# Altium PCB BRD131005.pcbdoc
Units mm, origin at the board's own origin, x right, y up, seen from the top; angles counter-clockwise.
Board outline 33 x 60 mm, 2 copper layers (Top Layer, Bottom Layer), stack 1.621 mm thick; 26 components, 15 nets, 63 pads, 0 vias.
Unrouted connection lines stored in the file: 2.
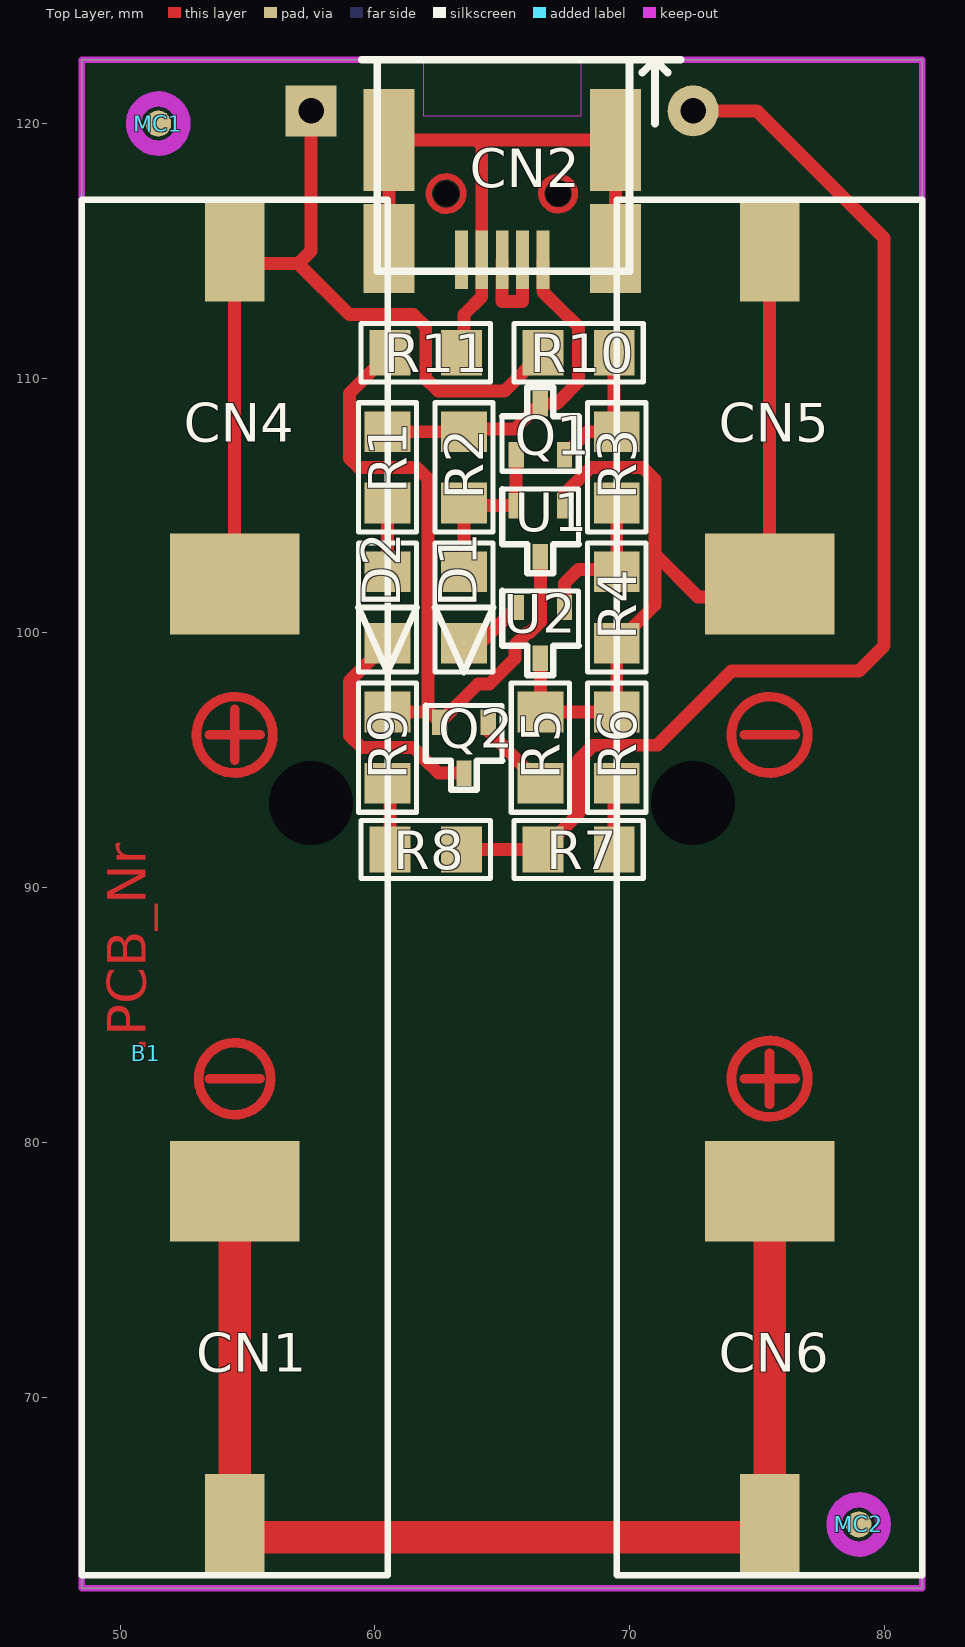
[diagram p0: Top Layer view]
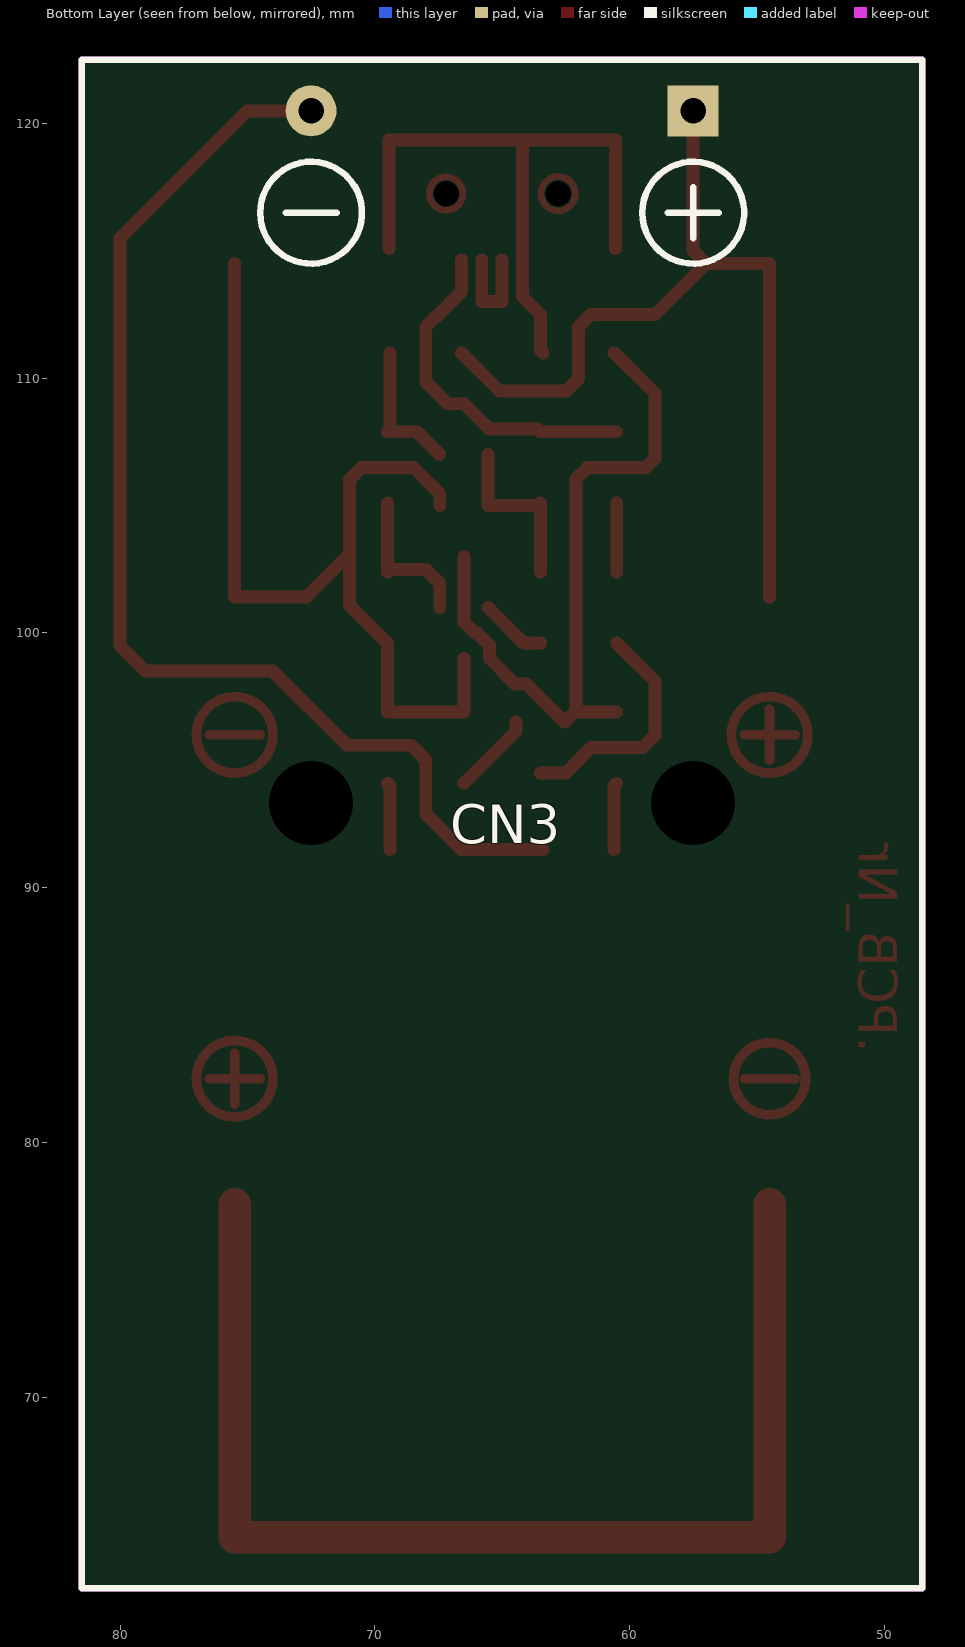
[diagram p1: Bottom Layer view, seen from below]
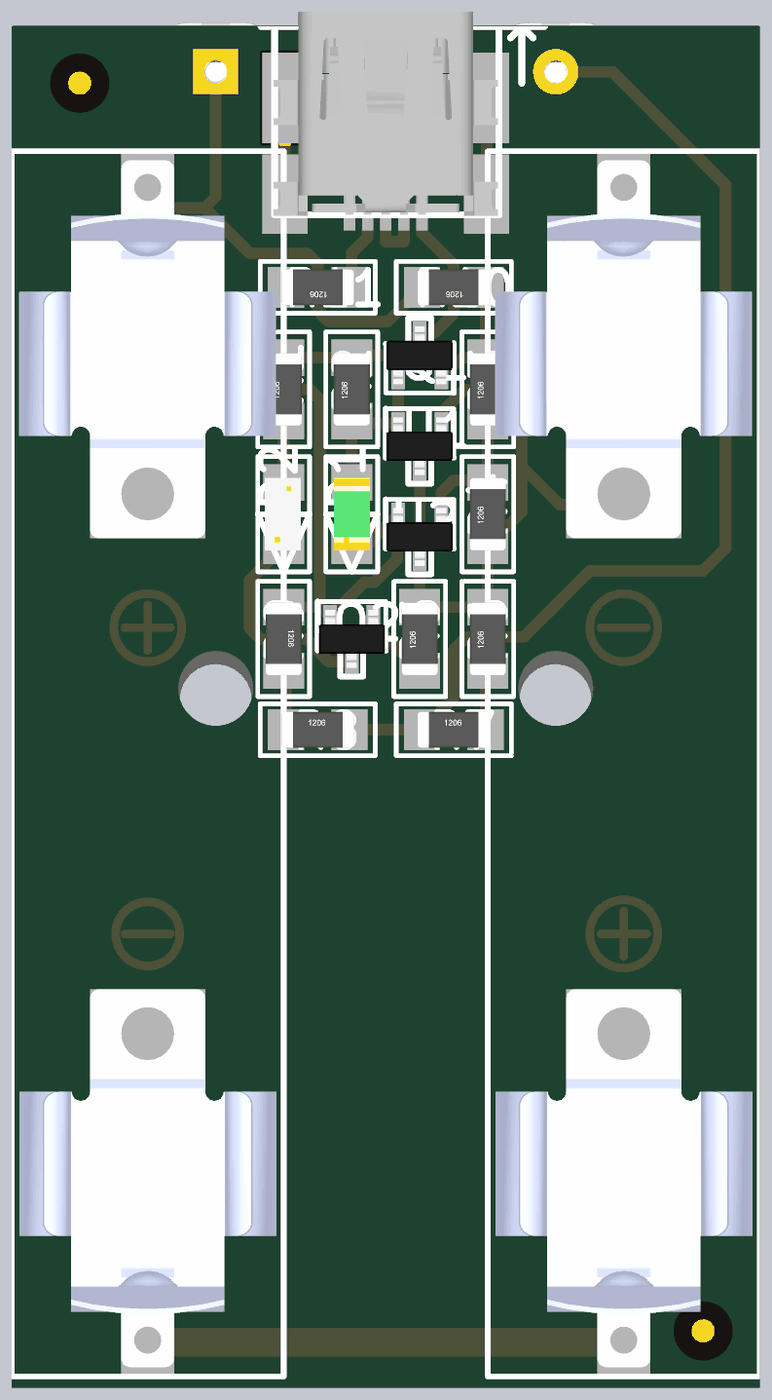
[diagram p2: 3D render of the assembled board from above, using the file's embedded part models]

## Layer stack, top to bottom
Top Layer: signal copper 0.0356
Dielectric: core 1.55, FR-4, Dk 4.8
Bottom Layer: signal copper 0.0356

## Board outline
48.5,62.5 48.5,122.5 81.5,122.5 81.5,62.5

## Design rules (kind name [scope] priority, off if disabled: settings)
Clearance [All] p1: gap=0.254
HoleSize [All] p1: absolutevalues=TRUE maxlimit=3.5 minlimit=0.6 maxpercent=80.000 minpercent=20.000
MinimumAnnularRing [All] p1: minimumring=0.254
MinimumSolderMaskSliver SilkscreenOverComponentPads [All] p2: minsoldermaskwidth=0.254
PolygonConnect [All] p1: connectstyle=Relief reliefconductorwidth=0.254 reliefentries=4 polygonreliefangle="90 Angle" airgapwidth=0.254
RoutingVias [All] p1: holewidth=0.6 width=1.2 viastyle="Through Hole" minholewidth=0.6 minwidth=1.2 maxholewidth=0.6 maxwidth=1.2
SolderMaskExpansion [All] p1: expansion=0
Width [All] p1: maxlimit=1.27 minlimit=0.381 preferedwidth=0.508
27 further rules are at their usual default settings.

## Components (designator, comment, footprint, x,y, rotation, side; value= is the part's Value field where it differs from the comment)
B1 "BRD131005/1" MC_BoardNr 51,83.5 r90 top
CN1 "BAT_CLIP_AAA" CN_BAT_CLIP_AAA_Keystone_55 54.5,65 r90 top
CN2 "CNUSB04F4" CN_USB_AB_mini 65,122.5 r270 top
CN3 "BAT_CLIP_AA" CN_BAT_CLIP_AA_KEYSTONE_2462 57.5,120.5 r90 bottom
CN4 "BAT_CLIP_AAA" CN_BAT_CLIP_AAA_Keystone_55 54.5,115 r270 top
CN5 "BAT_CLIP_AAA" CN_BAT_CLIP_AAA_Keystone_55 75.5,115 r270 top
CN6 "BAT_CLIP_AAA" CN_BAT_CLIP_AAA_Keystone_55 75.5,65 r90 top
D1 "KPT-3216SGC" DI_LED_1206_G 63.5,101 r270 top
D2 "SML-LX1206IW-TR" DI_LED_1206_R 60.5,101 r270 top
MC1 "Fiducial" MC_FIDUCIAL 51.5,120 r0 top
MC2 "Fiducial" MC_FIDUCIAL 79,65 r0 top
Q1 "MMBT2222A" SC_SOT23 66.5,108 r90 top
Q2 "MMBT2222A" SC_SOT23 63.5,95.5 r270 top
R1 "YRES470E" RE_1206 60.5,106.5 r90 top
R2 "YRES470E" RE_1206 63.5,106.5 r90 top
R3 "YRES15K" RE_1206 69.5,106.5 r90 top
R4 "12K / 1%" RE_1206 69.5,101 r90 top
R5 "12K / 1%" RE_1206 66.5,95.5 r90 top
R6 "4E7 / 1%" RE_1206 69.5,95.5 r90 top
R7 "4E7 / 1%" RE_1206 68,91.5 r0 top
R8 "4E7 / 1%" RE_1206 62,91.5 r0 top
R9 "1.5E/1%" RE_1206 60.5,95.5 r270 top
R10 "YRES0E" RE_1206 68,111 r180 top
R11 "YRES0E" RE_1206 62,111 r180 top
U1 "TLV431" SC_SOT23 66.5,104 r270 top
U2 "TLV431" SC_SOT23 66.5,100 r270 top

## Footprints (in the part's own frame and the unit in brackets; to place one, negate y for a bottom-side part, rotate by r counter-clockwise, add the part's x,y. Pads: shape width x height; smd on the part's side, far side on the other; paste and mask are expansions set on the pad)
CN_BAT_CLIP_AA_KEYSTONE_2462 [mm]
  rect 2x2 hole 1: 1(0,0)
  round 2 hole 1: 2(0,15)
  round 0 hole 3.3 unplated: 3(-27.18,0) 4(-27.18,15)
  silkscreen extent -58,-9 2,24, body extent -57.56,-8.97 2.16,23.95, height 16
CN_BAT_CLIP_AAA_Keystone_55 [mm] "Keystone 55: AAA battery clip"
  rect 3.96x2.34 smd: 1(0,0)
  rect 3.96x5.08 smd: 1(13.08,0)
  silkscreen extent -2,-6 52,6, body extent -1.6,-5.67 15.06,5.67, height 13.32
CN_USB_AB_mini [mm] "Mini AB connector"
  rect 2.3x0.5 smd: 1(7.85,1.6) 2(7.85,0.8) 3(7.85,0) 4(7.85,-0.8) 5(7.85,-1.6)
  rect 4x2 smd: 6(3.15,4.45)
  rect 4x2 smd mask+0.102: 6(3.15,-4.45)
  rect 3.5x2 smd: 6(7.4,4.45) 6(7.4,-4.45)
  round 0.9 hole 1: ""(5.25,2.2) ""(5.25,-2.2)
  Top Layer pour cut-out: 0,3.1 2.2,3.1 2.2,-3.1 0,-3.1
  Top Layer keep-out region: 0,-3.1 2.2,-3.1 2.2,3.1 0,3.1
  silkscreen extent 0,-5.5 8.3,7, body extent -0.65,-4.95 8.35,4.95, height 4
DI_LED_1206_G [mm]
  rect 1.6x1.8 smd: 1(-1.4,0) 2(1.4,0)
  silkscreen extent -2.54,-1.14 2.54,1.14, body extent -1.6,-0.79 1.6,0.81, height 1.11
DI_LED_1206_R [mm]
  rect 1.6x1.8 smd: 1(-1.4,0) 2(1.4,0)
  silkscreen extent -2.54,-1.14 2.54,1.14, body extent -1.6,-0.84 1.6,0.76, height 1.11
MC_BoardNr [mm] "Board number"
MC_FIDUCIAL [mil] "Fiducial"
  round 40 smd paste-3937.01 mask+31.5: 0(0,0)
  Top Layer keep-out circle w24: c0,0 r38
RE_1206 [mm] "Chip Resistor; Body 3.2 x 1.6 mm (LxW typ)"
  rect 1.6x1.8 smd: 1(-1.4,0) 2(1.4,0)
  silkscreen extent -2.54,-1.14 2.54,1.14, body extent -1.6,-0.8 1.6,0.8, height 1
SC_SOT23 [mm] "SOT23, 3-Leads, Body 2.9x1.3mm, Pitch 0.95mm, Lead Span 2.3mm, IPC High Density"
  rect 1x0.6 smd: 1(-1,0.95) 2(-1,-0.95) 3(1,0)
  silkscreen extent -1.65,-1.5 1.65,1.5, body extent -1.27,-1.46 1.27,1.46, height 0.99

## Part data
B1: library part BARE_PCB
CN2: "*"
D1: library part DI_LED_GREEN
D2: library part DI_LED_RED
Q1 Q2: "Amplifier Transistor NPN Silicon"
R1 R2 R3 R10 R11: "Resistor"
R4 R5: library part RC1206FR-0712KL, "Resistor"
R6 R7 R8: library part ASC1206-4R7FT5, "Resistor"
R9: library part MCSR12W1R50FTL, "Resistor"

## Nets (pads, with @x,y where several pads share a name; then routed paths per layer and width w, separated by ;. In a path a pad name is that pad's centre, name@x,y a point inside that pad or via, vN(x,y) a via of type N, cw(c..) or ccw(c..) an arc to the next point about the centre after c; other vN are vias at no path point)
GND: CN2.4 CN2.6 Q2.2 R9.1 R11.1 R11.2 U1.3 | length 54.1
  Top Layer w0.508: R9.1 62.15,96.9 ; CN2.6@60.55,115.1 60.55,119.35 64,119.35 ; R11.2 59,109.4 59,106.857 59.357,106.5 61.643,106.5 62.092,106.051 62.092,96.958 62.15,96.9 ; R11.1 63.5,111.1 63.5,112.5 64.2,113.2 CN2.4 64.2,119.15 64,119.35 ; 65.974,99.992 65.5,99.518 65.5,99 64.5,98 64.05,98 Q2.2 62.15,96.9 ; 66.076,100.008 66.5,100.432 66.5,101 U1.3 ; CN2.6@69.45,115.1 69.45,119.35 64,119.35
NetCN1_1: CN1.1 CN6.1 | length 47.2
  Top Layer w1.27: CN1.1@54.5,77.58 54.5,64.5 75.5,64.5 CN6.1@75.5,77.58
NetCN2_1: CN2.1 Q1.3 R1.2 R2.2 | length 13.6
  Top Layer w0.508: R1.2 R2.2@63.4,107.9 ; R2.2 63.608,108.008 65.508,108.008 Q1.3 67.143,109 68,109.857 68,112.018 67.61,112.408 67.592,112.408 66.6,113.4 CN2.1
NetCN2_2: CN2.2 CN2.3 | length 4.1
  Top Layer w0.508: CN2.3 65,113.012 65.8,113.012 CN2.2
NetCN3_2: CN3.2 R7.1 R8.2 | length 46.7
  Top Layer w0.508: R8.2 R7.1 68,92.9 68,95.018 68.574,95.592 71.092,95.592 74,98.5 79,98.5 80,99.5 80,115.5 75,120.5 CN3.2
NetCN5_1: CN5.1 R4.1 R5.2 R6.2 U1.1 U2.3 | length 37.8
  Top Layer w0.508: U2.3 R5.2 R6.2 R4.1 71,101.1 71,106.018 70.518,106.5 68.482,106.5 67.45,105.468 U1.1 ; 71,103.1 72.68,101.42 75.5,101.42 CN5.1@75.5,114.5
NetD1_1: D1.1 Q1.1 R2.1 U1.2 | length 6.8
  Top Layer w0.508: D1.1 R2.1 63.6,105 U1.2 Q1.1
NetD1_2: D1.2 U2.2 | length 2.6
  Top Layer w0.508: D1.2 64.15,99.6 U2.2
NetD2_1: D2.1 R1.1 | length 2.7
  Top Layer w0.508: D2.1 R1.1
NetD2_2: D2.2 Q2.3 | length 9.4
  Top Layer w0.508: D2.2 59,98.1 59,95.982 59.482,95.5 61.519,95.5 61.908,95.11 61.908,95.092 62.5,94.5 Q2.3
NetQ2_1: Q2.1 R5.1 | length 3.2
  Top Layer w0.508: Q2.1 64.45,96.15 R5.1
NetR3_1: R3.1 R4.2 U2.1 | length 6
  Top Layer w0.508: U2.1 67.45,101.95 68,102.5 69.4,102.5 R4.2 R3.1
NetR6_1: R6.1 R7.2 | length 2.6
  Top Layer w0.508: R7.2 69.4,94 R6.1
NetR8_1: R8.1 R9.2 | length 2.6
  Top Layer w0.508: R9.2 60.6,94 R8.1
VA: CN3.1 CN4.1 Q1.2 R3.2 R10.1 R10.2 | length 40.8
  Top Layer w0.508: CN4.1@54.5,101.42 54.5,114.5 57,114.5 ; CN3.1 57.5,115 57,114.5 ; R10.2 65.1,109.5 62.482,109.5 62,109.982 62,112.018 61.518,112.5 59,112.5 57,114.5 ; Q1.2 68.35,107.9 R3.2 69.4,108 R10.1
pads on no net: CN2. CN2.5 CN3.3 CN3.4 MC1.0 MC2.0
copper on no net: | length 57.5
  Top Layer w0.254: 63.475,117.25 ccw(c62.8,117.25) 63.475,117.25 ; 67.859,117.25 ccw(c67.2,117.25) 67.859,117.25
  Top Layer w0.381: 53.5,82.5 55.5,82.5 ; 53.5,96 55.5,96 ; 54.5,95 54.5,97 ; 74.5,82.5 76.5,82.5 ; 74.5,96 76.5,96 ; 75.5,81.5 75.5,83.5 ; 55.914,82.5 ccw(c54.5,82.5) 55.914,82.5 ; 56,96 ccw(c54.5,96) 56,96 ; 77,82.5 ccw(c75.5,82.5) 77,82.5 ; 77,96 ccw(c75.5,96) 77,96

## Keep-outs
Keep-Out Layer:
  lines w0.254: 48.5,62.5 81.5,62.5 81.5,122.5 71,122.5 59,122.5 48.5,122.5 48.5,62.5

## Silkscreen, mask and mechanical layers (free items; w line width, h text height)
Mechanical 4:
  lines w0.127: 5.08,0 0,0 ; 35.56,140.97 5.08,140.97 ; 48.26,0 48.26,5.08 ; 48.26,140.97 48.26,146.05 ; 73.66,12.725 187.96,12.725 ; 73.66,20.345 187.96,20.345 ; 73.66,27.965 111.76,27.965 ; 96.52,0 96.52,5.08 ; 96.52,140.97 96.52,146.05 ; 111.76,5.105 111.76,20.345 111.76,35.585 ; 144.78,0 144.78,5.08 ; 144.78,140.97 144.78,146.05 ; 165.1,5.105 165.1,20.345 ; 187.96,0 193.04,0 ; 0,0 193.04,0 ; 0,0 0,146.05 193.04,146.05 193.04,0 ; 5.08,140.97 187.96,140.97 187.96,5.08 5.08,5.08 5.08,140.97 ; 73.66,5.105 73.66,35.585 ; 73.66,5.105 187.96,5.105 187.96,35.585 111.76,35.585 ; 73.66,5.105 38.1,5.105 38.1,35.585 73.66,35.585 ; 73.66,35.585 111.76,35.585 ; 0,73.025 5.08,73.025 0,73.025 ; 187.96,73.025 193.04,73.025 187.96,73.025
  text "A" at 168.529,143.993 h1.78 r90
  text "D" at 25.019,142.723 h1.78 r270
  text "C" at 72.644,142.723 h1.78 r270
  text "B" at 118.364,142.723 h1.78 r270
  text "2" at 3.429,110.338 h1.78 r90
  text "2" at 191.389,110.338 h1.78 r90
  text "1" at 3.429,37.313 h1.78 r90
  text "1" at 191.389,37.313 h1.78 r90
  text "ENGINEER:" at 74.93,33.045 h1.14
  text "TITLE:" at 113.03,33.045 h1.14
  text ".ProjectName" at 119.38,26.238 h2.5
  text "PCB DESIGNER:" at 74.93,25.552 h1.14
  text ".DrawnByX" at 87.757,22.581 h2.5
  text "DATE:" at 74.93,17.805 h1.14
  text "PART NO.:" at 113.03,17.805 h1.14
  text "REV:" at 166.37,17.805 h1.14
  text ".PRINT_DATE" at 76.2,14.757 h1.78
  text ".RevisionNR" at 166.421,14.427 h2.5
  text "FILE NAME:" at 74.93,10.185 h1.14
  text "DWG NO:" at 113.03,10.185 h1.14
  text "SCALE:" at 166.37,10.185 h1.14
  text ".PCB_Nr" at 121.996,7.747 h2.5
  text ".PCB_FILE_NAME_NO_PATH" at 76.2,7.137 h1.78
  text "D" at 22.022,1.905 h1.78 r270
  text "C" at 70.028,1.905 h1.78 r270
  text "B" at 118.542,1.905 h1.78 r270
  text "A" at 166.599,1.905 h1.78 r270
Mechanical 5:
  lines w0.127: 5.08,0 0,0 ; 5.08,12.725 119.38,12.725 ; 5.08,20.345 119.38,20.345 ; 27.94,5.105 27.94,20.345 ; 48.26,0 48.26,5.08 ; 48.26,140.97 48.26,146.05 ; 81.28,5.105 81.28,20.345 81.28,35.585 ; 81.28,27.965 119.38,27.965 ; 96.52,0 96.52,5.08 ; 96.52,140.97 96.52,146.05 ; 144.78,0 144.78,5.08 ; 144.78,140.97 144.78,146.05 ; 157.48,140.97 187.96,140.97 ; 187.96,0 193.04,0 ; 0,0 193.04,0 ; 0,0 0,146.05 193.04,146.05 193.04,0 ; 81.28,35.585 5.08,35.585 5.08,5.105 119.38,5.105 ; 81.28,35.585 119.38,35.585 ; 119.38,5.105 119.38,35.585 ; 119.38,5.105 154.94,5.105 154.94,35.585 119.38,35.585 ; 187.96,140.97 5.08,140.97 5.08,5.08 187.96,5.08 187.96,140.97 ; 0,73.025 5.08,73.025 0,73.025 ; 187.96,73.025 193.04,73.025 187.96,73.025
  text "A" at 25.019,143.993 h1.78 r270
  text "B" at 72.644,143.993 h1.78 r270
  text "C" at 118.364,143.993 h1.78 r270
  text "D" at 166.624,143.993 h1.78 r270
  text "2" at 1.524,110.338 h1.78 r270
  text "2" at 189.484,110.338 h1.78 r270
  text "1" at 1.524,37.313 h1.78 r270
  text "1" at 189.484,37.313 h1.78 r270
  text "TITLE:" at 80.01,33.045 h1.14
  text "ENGINEER:" at 118.11,33.045 h1.14
  text ".ProjectName" at 74.549,26.441 h2.5
  text "PCB DESIGNER:" at 118.11,25.552 h1.14
  text ".DrawnByX" at 105.664,22.504 h2.5
  text "REV:" at 26.67,17.805 h1.14
  text "PART NO.:" at 80.01,17.805 h1.14
  text "DATE:" at 118.11,17.805 h1.14
  text ".PRINT_DATE" at 116.84,14.757 h1.78
  text ".RevisionNR" at 27.483,13.36 h2.5
  text "SCALE:" at 26.67,10.185 h1.14
  text "DWG NO:" at 80.01,10.185 h1.14
  text "FILE NAME:" at 118.11,10.185 h1.14
  text ".PCB_FILE_NAME_NO_PATH" at 116.84,7.137 h1.78
  text ".PCB_Nr" at 72.263,6.883 h2.5
  text "B" at 70.104,3.023 h1.78 r270
  text "C" at 118.364,3.023 h1.78 r270
  text "D" at 166.624,3.023 h1.78 r270
  text "A" at 21.844,1.753 h1.78 r270
Mechanical 8:
  lines w0.254: 48.5,62.5 81.5,62.5 81.5,122.5 71,122.5 59,122.5 48.5,122.5 48.5,62.5
Drill Drawing:
  lines w0.203: 7.62,40.64 7.62,38.1 10.16,38.1 ; 7.62,137.16 7.62,139.7 10.16,139.7 ; 182.88,38.1 185.42,38.1 185.42,40.64 ; 182.88,139.7 185.42,139.7 185.42,137.16
  text ".legend" at 87,76.5 h1.52

## Dimensions
81.5,62.5 to 48.5,62.5 on Mechanical 2